# Altium PCB PCB.PcbDoc
Units mm, origin at the board's own origin, x right, y up, seen from the top; angles counter-clockwise.
Board outline 38 x 38 mm, 4 copper layers (L1 (SIG/PWR), L2 (GND), L3 (SIG/GND), L4 (SIG/PWR)), stack 0.603 mm thick; 79 components, 43 nets, 247 pads, 133 vias.
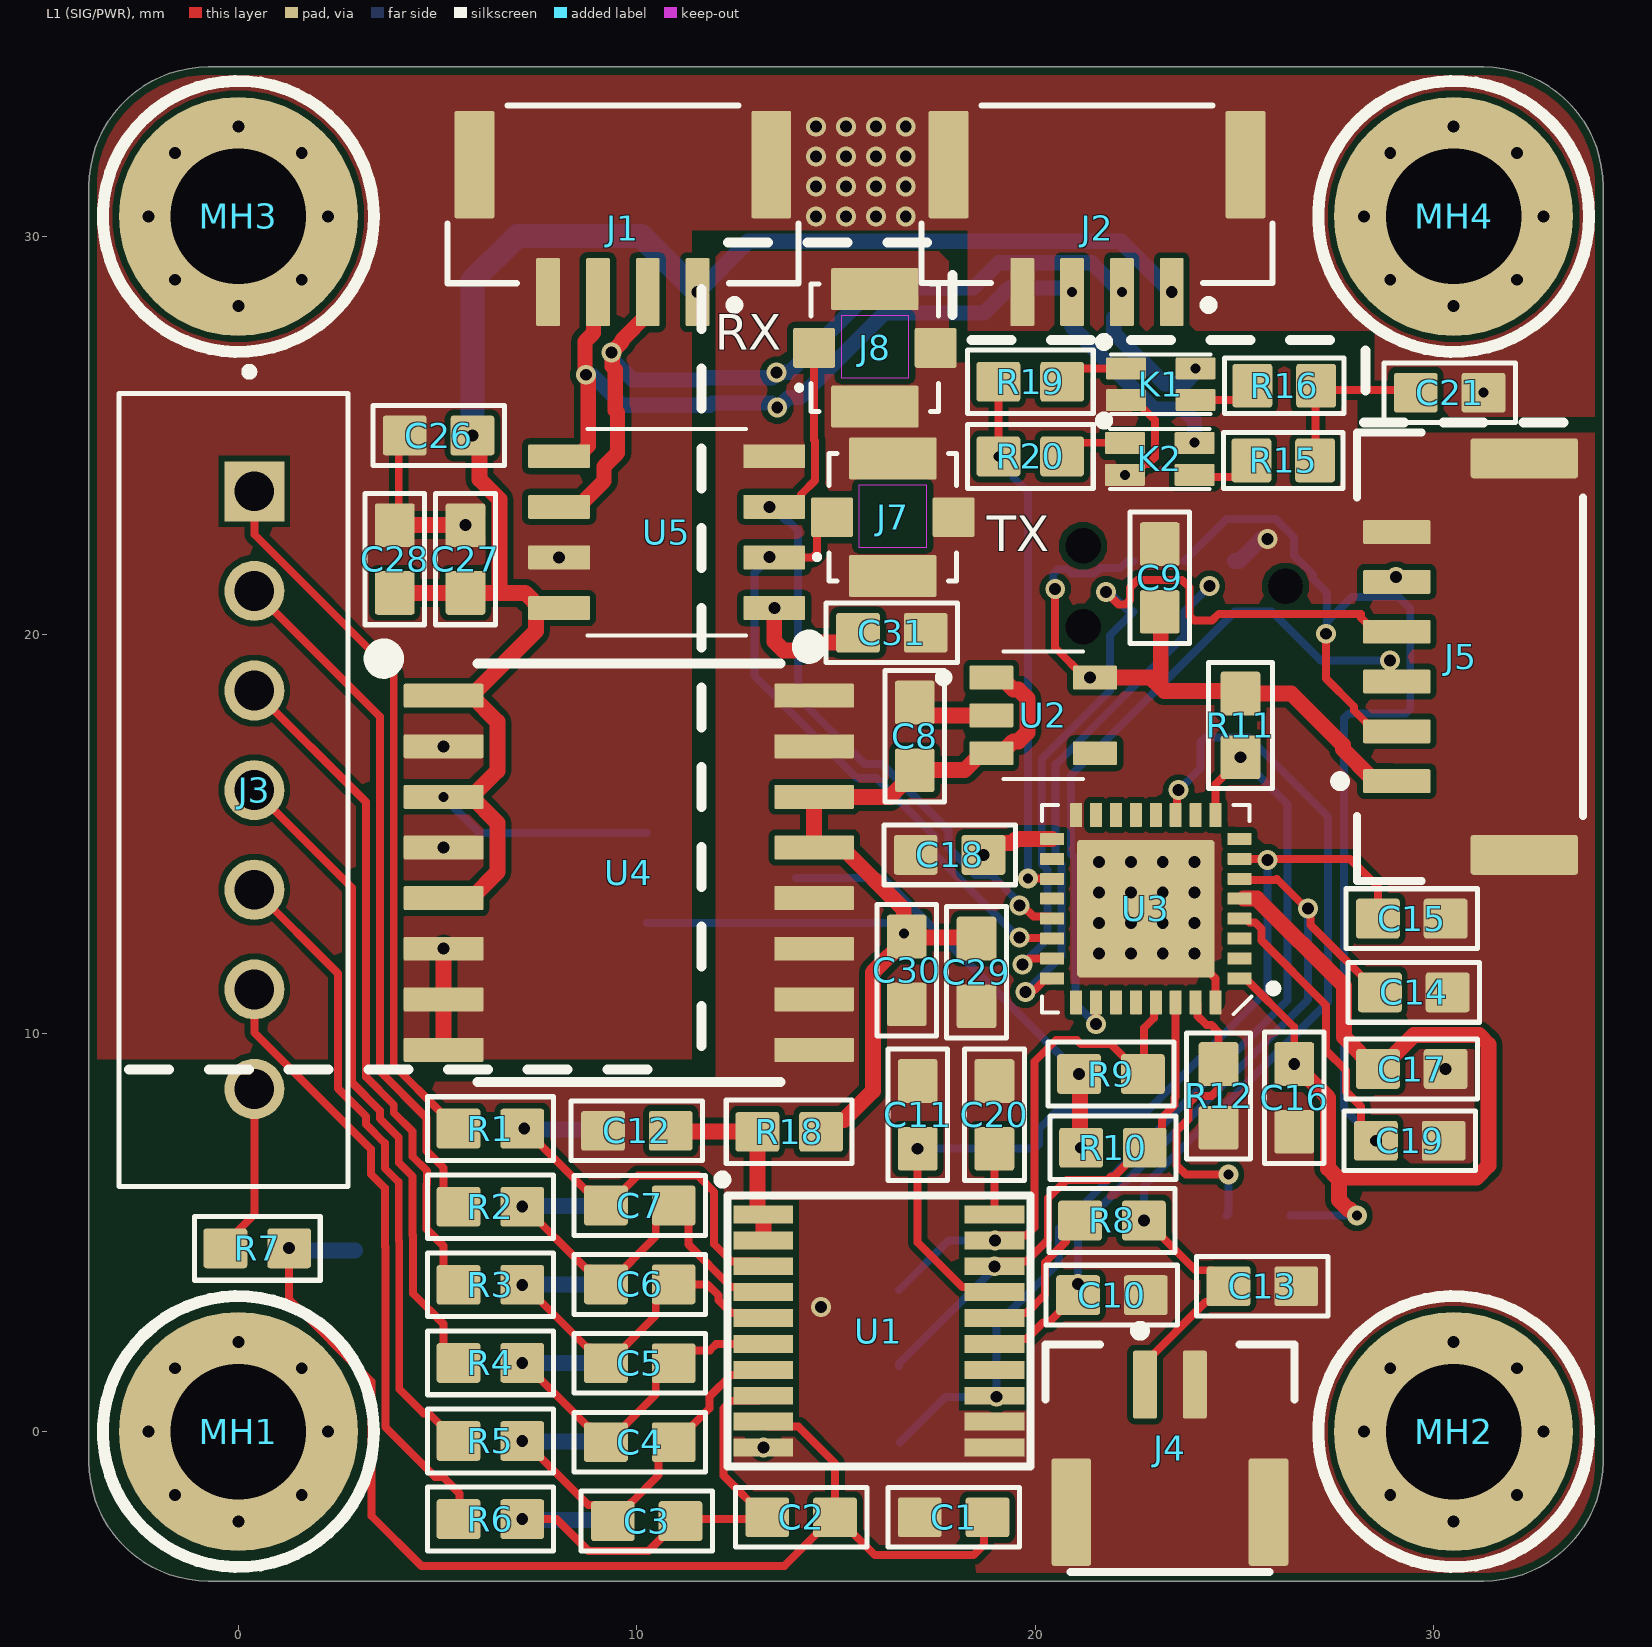
[diagram p0: L1 (SIG/PWR) view]
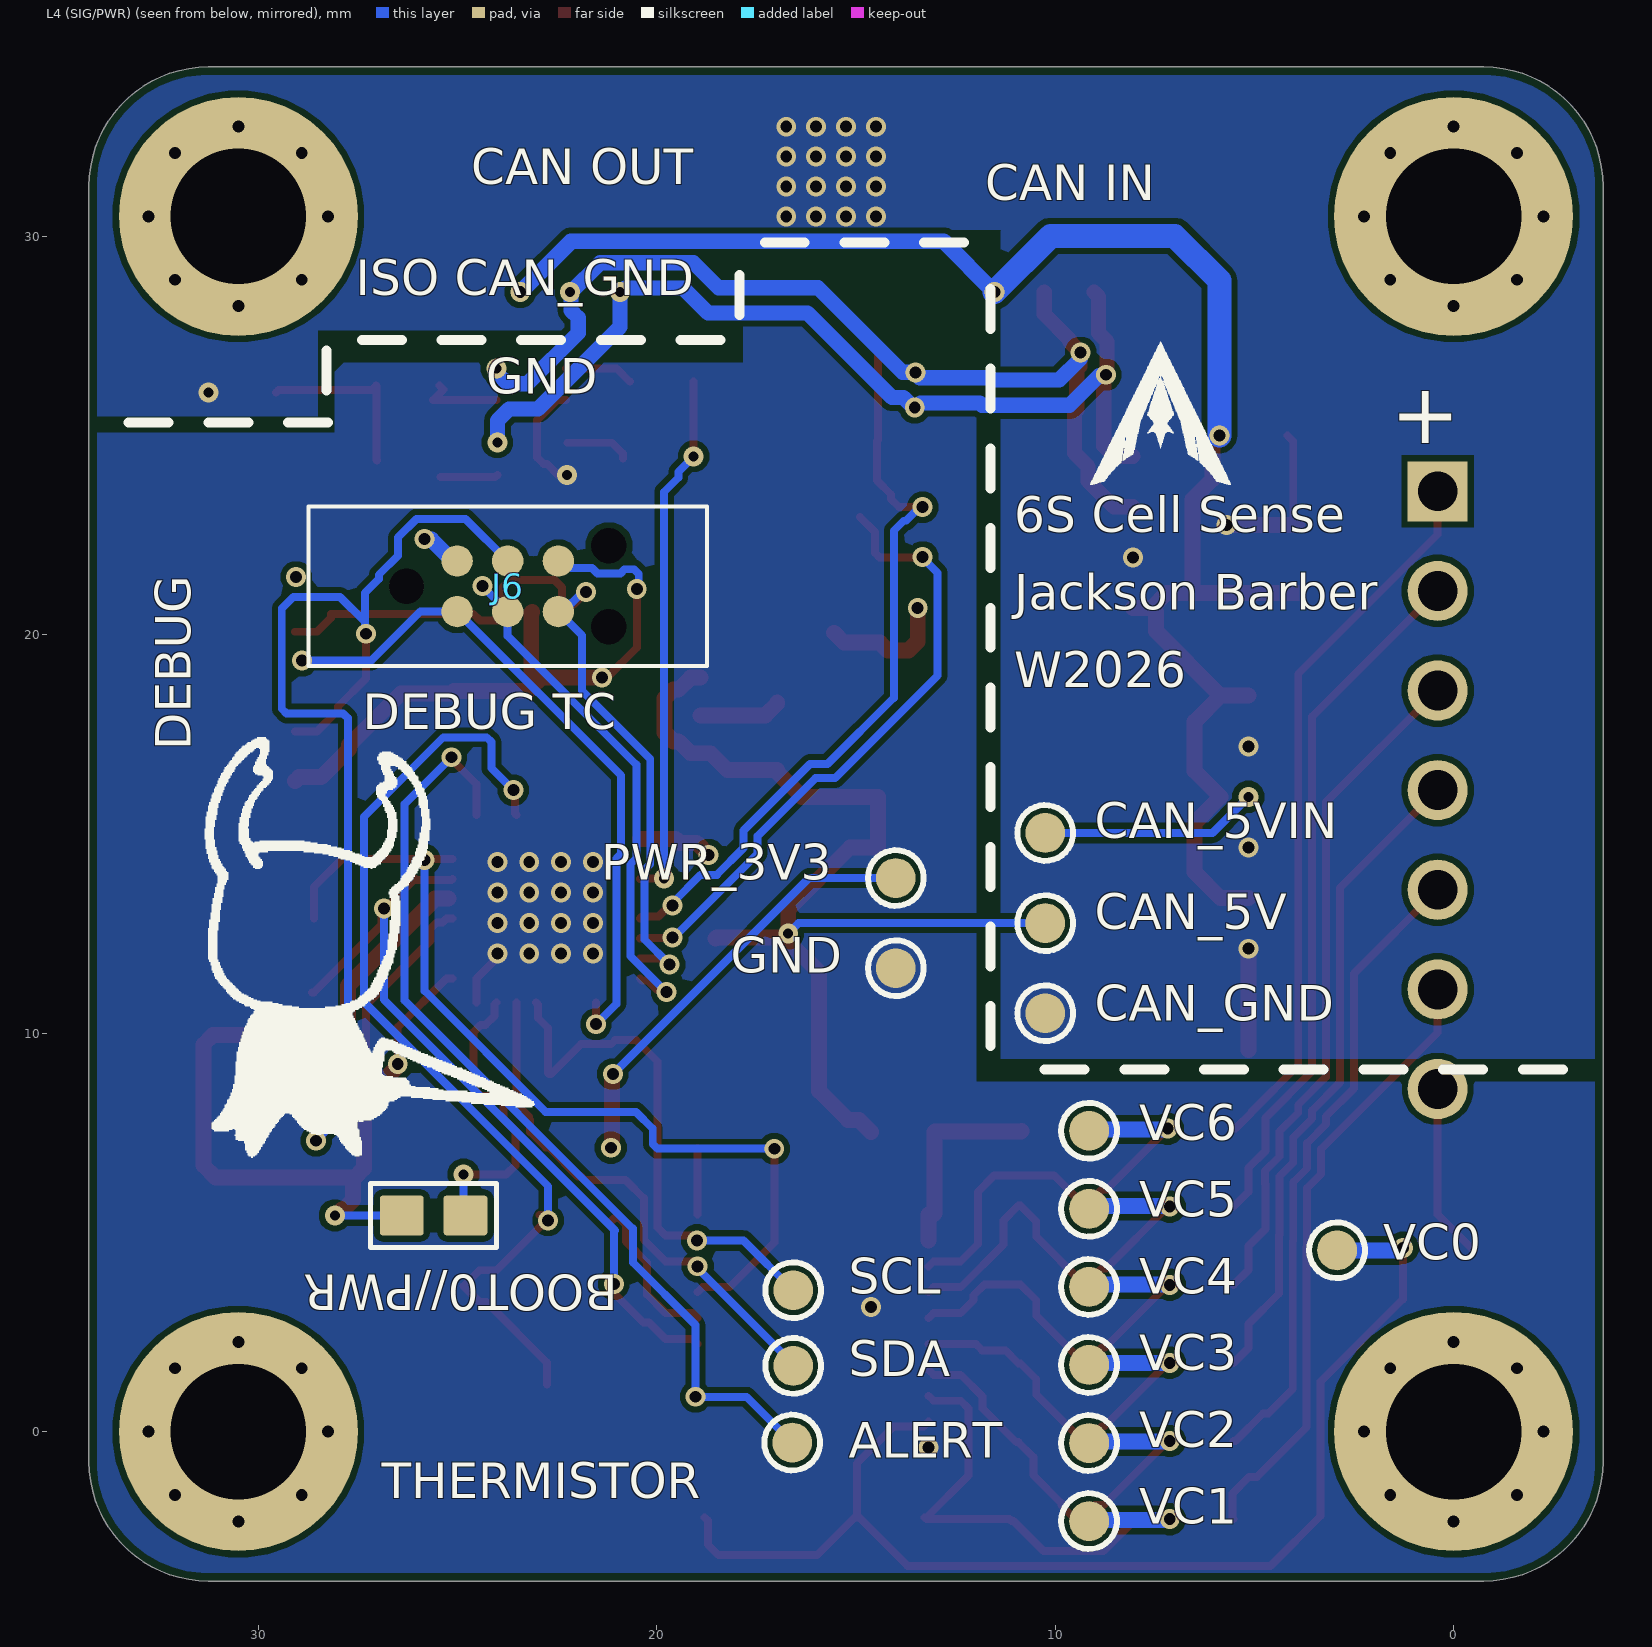
[diagram p1: L4 (SIG/PWR) view, seen from below]
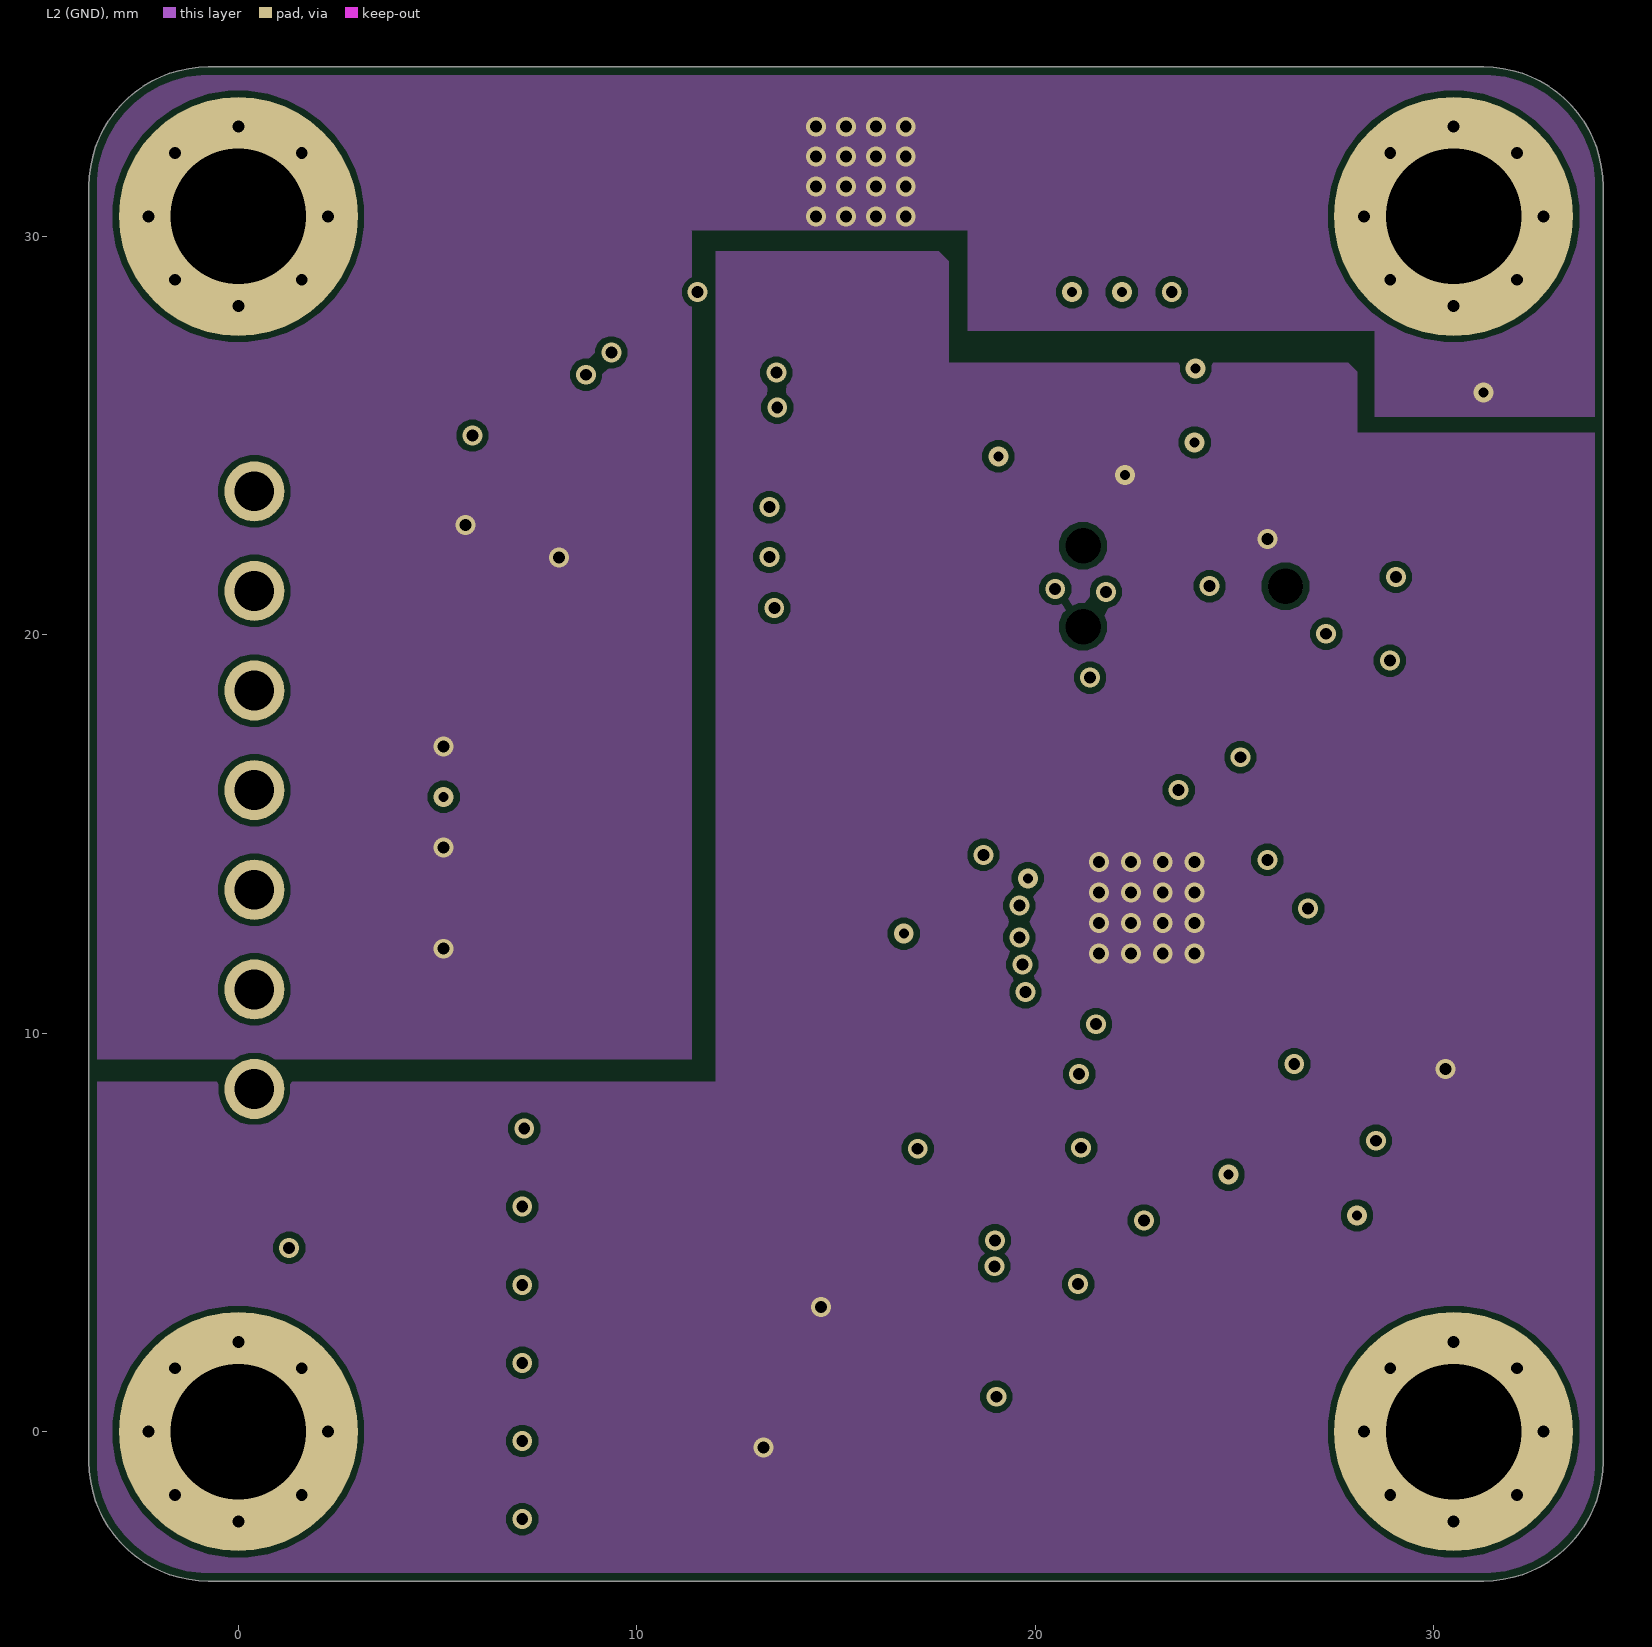
[diagram p2: L2 (GND)]
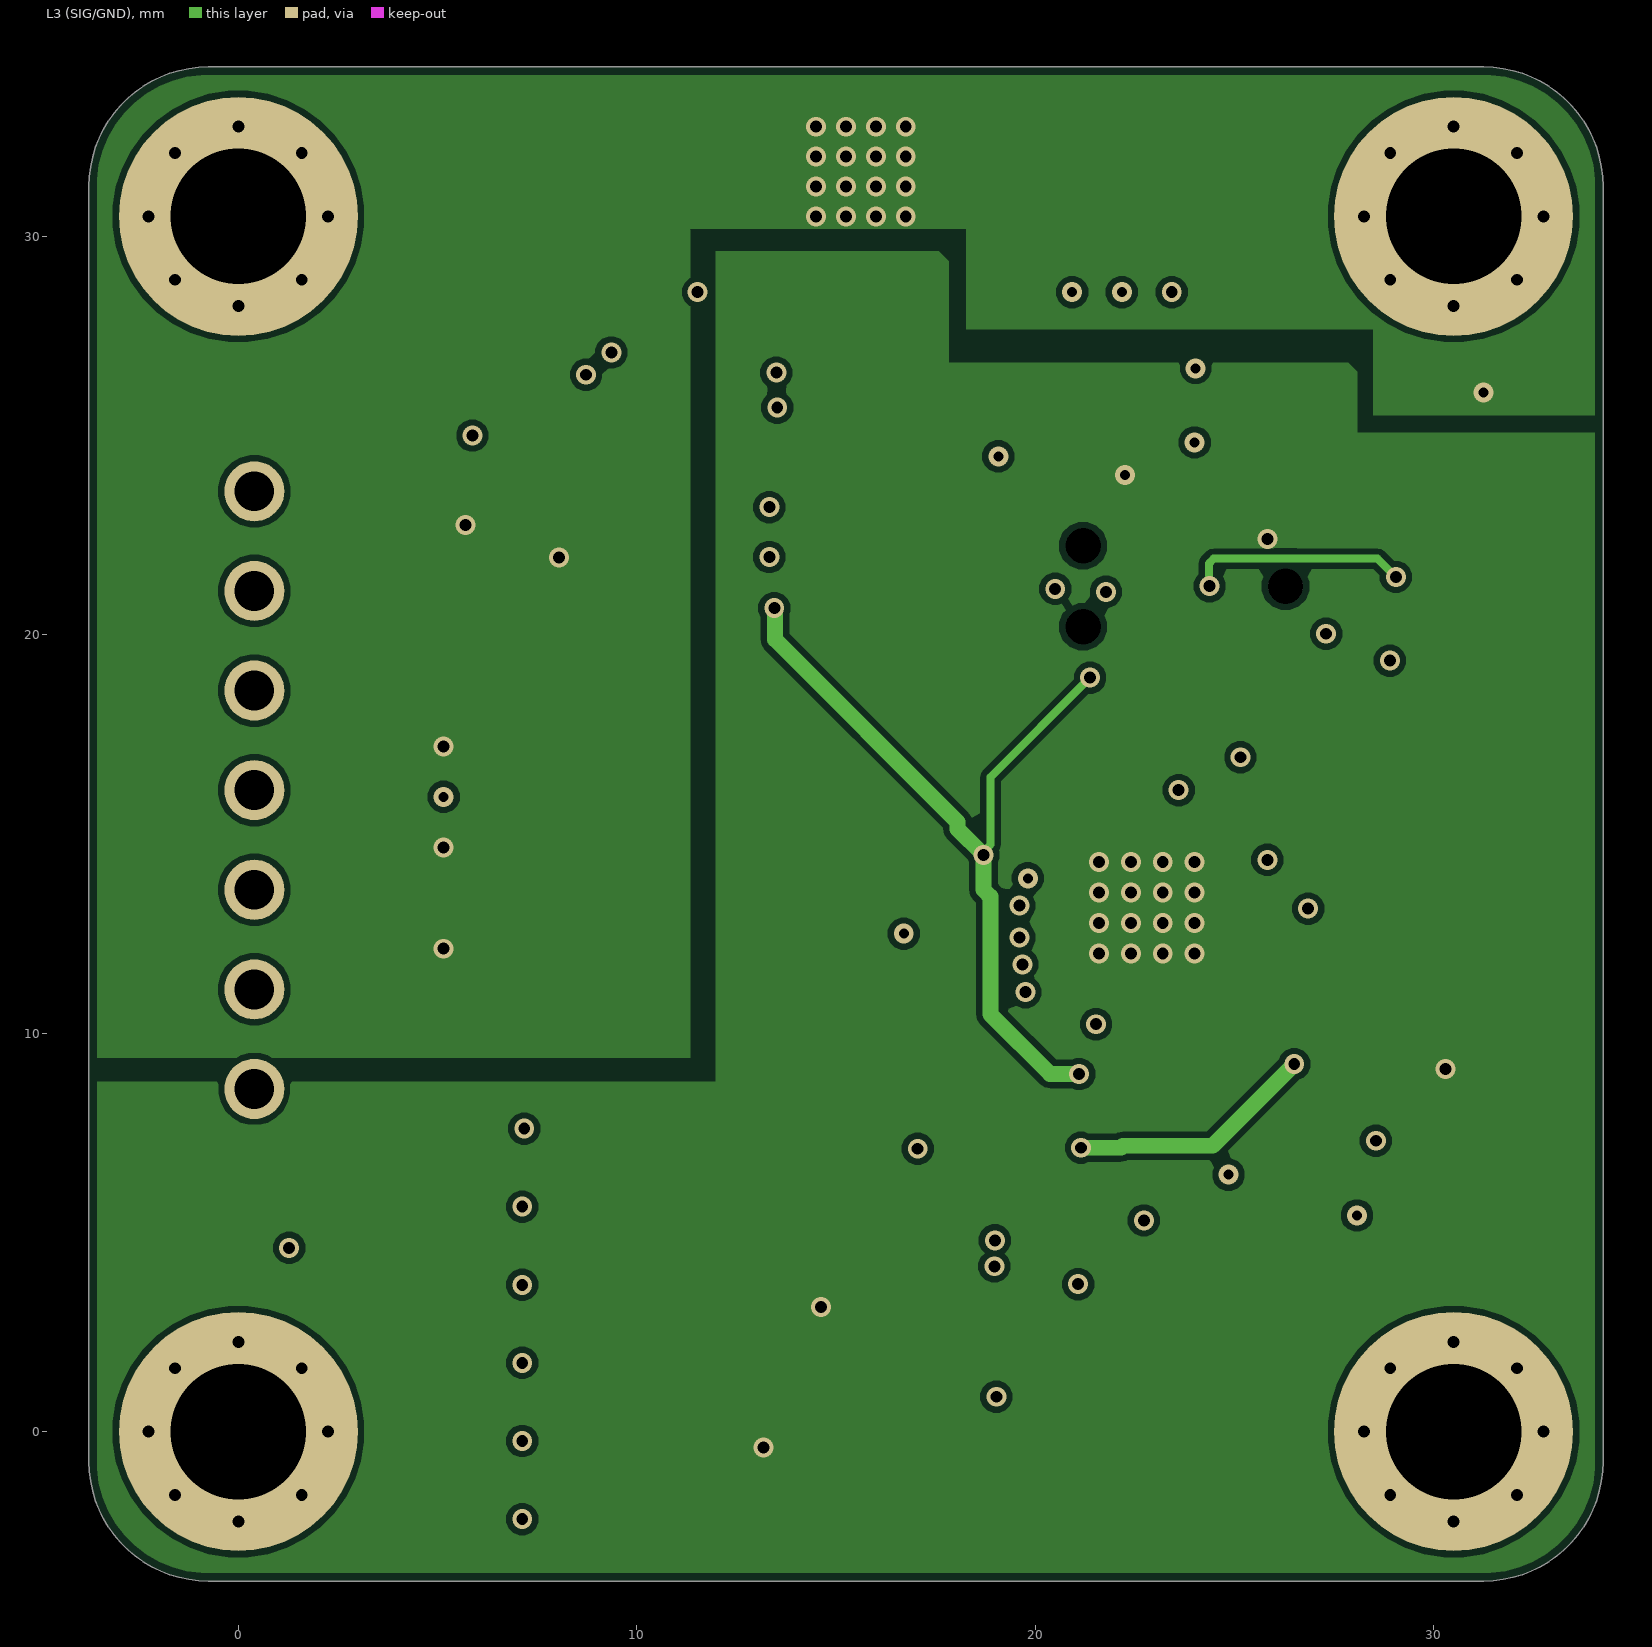
[diagram p3: L3 (SIG/GND)]
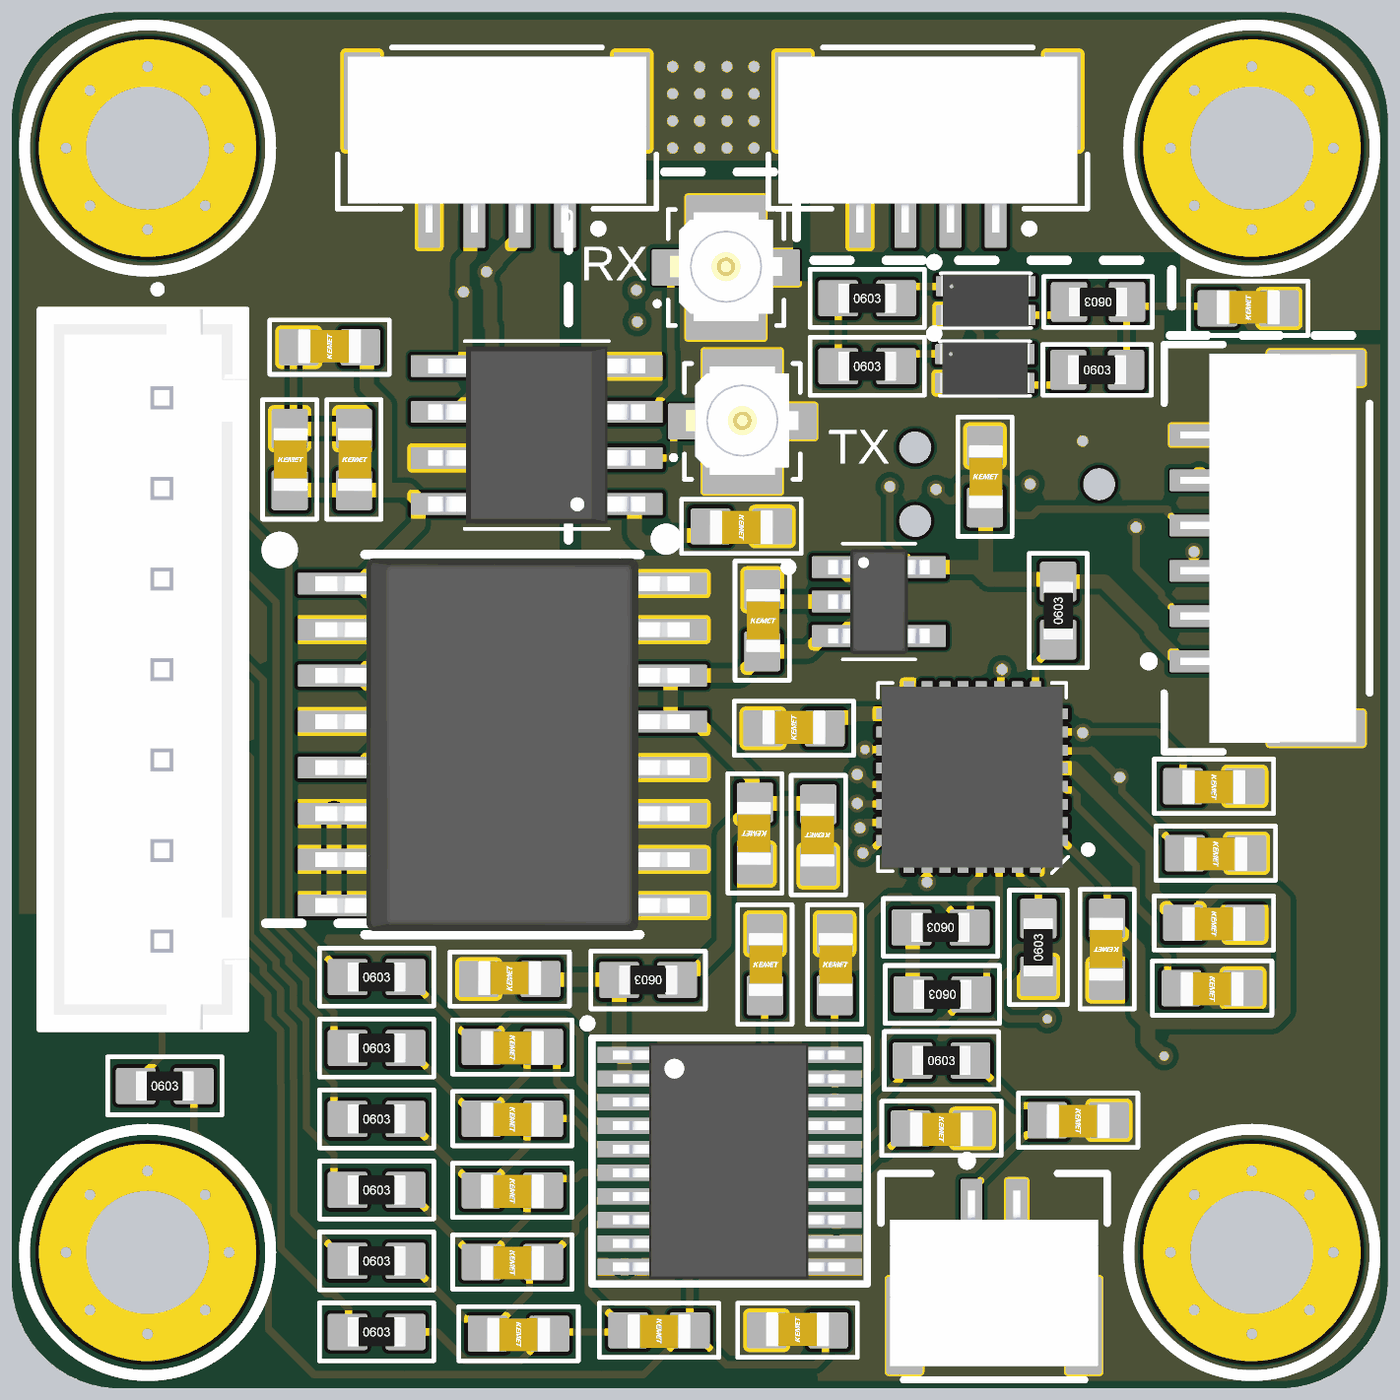
[diagram p4: 3D render of the assembled board from above, using the file's embedded part models]

## Layer stack, top to bottom
Top Solder: solder mask 0.0102, Solder Resist, Dk 3.5
L1 (SIG/PWR): signal copper 0.0356
Dielectric 2: prepreg 0.0711, PP-006, Dk 4.1
L2 (GND): signal copper 0.035
Dielectric 1: dielectric 0.32, FR-4, Dk 4.8
L3 (SIG/GND): signal copper 0.035
Dielectric 3: prepreg 0.0711, PP-006, Dk 4.1
L4 (SIG/PWR): signal copper 0.0356
Bottom Solder: solder mask 0.0102, Solder Resist, Dk 3.5

## Board outline
-3.75,-0.75 -3.75,31.25 cw(c-0.75,31.25) -0.75,34.25 31.25,34.25 cw(c31.25,31.25) 34.25,31.25 34.25,-0.75 cw(c31.25,-0.75) 31.25,-3.75 -0.75,-3.75 cw(c-0.75,-0.75)

## Design rules (kind name [scope] priority, off if disabled: settings)
BoardOutlineClearance [IsPolygon] p1: gap=0.2 ignorepadtopadclearanceinfootprint=FALSE
Clearance [All] p1: gap=0.15 ignorepadtopadclearanceinfootprint=FALSE
DiffPairsRouting [All] p1: maxlimit=0.254 minlimit=0.254 mostfreqgap=0.254 toplayer_minwidth=0.381 toplayer_maxwidth=0.381 toplayer_prefwidth=0.381 midlayer1_minwidth=0.381 midlayer1_maxwidth=0.381 midlayer1_prefwidth=0.381 midlayer2_minwidth=0.381 midlayer2_maxwidth=0.381 midlayer2_prefwidth=0.381 bottomlayer_minwidth=0.381 bottomlayer_maxwidth=0.381 bottomlayer_prefwidth=0.381 maxuncoupledlength=12.7
HoleSize [All] p1: absolutevalues=TRUE maxlimit=4 minlimit=0.025 maxpercent=80.000 minpercent=20.000
MinimumSolderMaskSliver [All] p1: minsoldermaskwidth=0.1
PolygonConnect [IsVia] p1: connectstyle=Direct reliefconductorwidth=0.254 reliefentries=4 polygonreliefangle="90 Angle" airgapwidth=0.254
PolygonConnect PolygonConnect_1 [All] p2: connectstyle=Direct reliefconductorwidth=0.254 reliefentries=4 polygonreliefangle="90 Angle" airgapwidth=0.254
RoutingVias [All] p1: holewidth=0.25 width=0.5 viastyle="Through Hole" minholewidth=0.25 minwidth=0.5 maxholewidth=0.3 maxwidth=0.5
ShortCircuit [InAnyNet vs InAnyNet] p1: allowed=FALSE
SolderMaskExpansion SolderMaskExpansion_2 [InComponent('U3')] p1: expansion=0.04 istentingtop=FALSE
SolderMaskExpansion SolderMaskExpansion_1 [IsVia] p2: expansion=0.102 istentingtop=TRUE
SolderMaskExpansion [All] p3: expansion=0.102 istentingtop=FALSE
SupplyNets "Schematic Supply Nets_4" [InNet('CAN_GND')] p1: voltage=0.000
SupplyNets "Schematic Supply Nets_3" [InNet('CAN_5VIN')] p2: voltage=0.000
SupplyNets "Schematic Supply Nets_2" [InNet('PWR_3V3')] p3: voltage=0.000
SupplyNets "Schematic Supply Nets_1" [InNet('GND')] p4: voltage=0.000
SupplyNets "Schematic Supply Nets" [InNet('CAN_5V')] p5: voltage=0.000
UnRoutedNet UnRoutedNet_1 [InAnyNet] p1:
Width [All] p1: maxlimit=0.6 minlimit=0.2 preferedwidth=0.4 minimp=50.000000 maximp=50.000000 favimp=50.000000
25 further rules are at their usual default settings.

## Classes and differential pairs
component class MCU: C1 C2 C3 C4 C5 C6 C7 C8 C9 C10 C11 C12 C13 C14 C15 C16 C17 C18 C19 C20 J3 J4 J5 J6 MH1 MH2 MH3 MH4 R1 R2 R3 R4 R5 R6 R7 R8 R9 R10 R11 R12 R18 TP1 TP2 TP3 TP4 TP5 TP6 TP7 TP8 TP9 TP10 TP11 TP12 TP13 TP14 TP15 U1 U2 U3
component class CAN: C21 C26 C27 C28 C29 C30 C31 J1 J2 J7 J8 K1 K2 R15 R16 R19 R20 U4 U5
differential pair CAN: +CAN_H -CAN_L

## Components (designator, comment, footprint, x,y, rotation, side; value= is the part's Value field where it differs from the comment)
ALERT "TESTINGPOINT_1MM" TESTINGPOINT_1MM-Footprint-1 16.6,-0.275 r90 bottom (schematic designator TP10)
BOOT0//PWR "RC0603JR-070RL" .RES_0603-Footprint-1 25.6,5.425 r0 bottom value=0
C1 "GRT188R61H105KE13D" .CAP_0603-Footprint-1 17.95,-2.15 r0 top
C2 "GRT188R61H105KE13D" .CAP_0603-Footprint-1 14.125,-2.15 r180 top
C3 "GRT188R61H105KE13D" .CAP_0603-Footprint-1 10.247,-2.245 r180 top
C4 "GRT188R61H105KE13D" .CAP_0603-Footprint-1 10.075,-0.265 r180 top
C5 "GRT188R61H105KE13D" .CAP_0603-Footprint-1 10.075,1.715 r180 top
C6 "GRT188R61H105KE13D" .CAP_0603-Footprint-1 10.075,3.695 r180 top
C7 "GRT188R61H105KE13D" .CAP_0603-Footprint-1 10.075,5.675 r180 top
C8 "GRT188R61H105KE13D" .CAP_0603-Footprint-1 16.975,17.45 r270 top
C9 "GRT188R61H105KE13D" .CAP_0603-Footprint-1 23.125,21.425 r270 top
C10 "GCM188R71H104KA57D" .CAP_0603-Footprint-1 21.925,3.425 r180 top value=0.1uF
C11 "GRT188R61H105KE13D" .CAP_0603-Footprint-1 17.05,7.95 r270 top
C12 "GRM188R6YA106MA73D" .CAP_0603-Footprint-1 10,7.55 r0 top
C13 "GCM188R71H104KA57D" .CAP_0603-Footprint-1 25.7,3.65 r180 top value=0.1uF
C14 "GCM188R71H104KA57D" .CAP_0603-Footprint-1 29.5,11.025 r180 top value=0.1uF
C15 "GCM188R71H104KA57D" .CAP_0603-Footprint-1 29.45,12.875 r180 top value=0.1uF
C16 "GRM188Z71C475KE21J" .CAP_0603-Footprint-1 26.5,8.375 r90 top value=4.7uF
C17 "GCM188R71H104KA57D" .CAP_0603-Footprint-1 29.45,9.1 r180 top value=0.1uF
C18 "GCM188R71H104KA57D" .CAP_0603-Footprint-1 17.85,14.475 r0 top value=0.1uF
C19 "GCM188R71H104KA57D" .CAP_0603-Footprint-1 29.4,7.3 r180 top value=0.1uF
C20 "GRM188Z71C475KE21J" .CAP_0603-Footprint-1 18.975,7.95 r270 top value=4.7uF
C21 "GCM188R71H472KA37D" .CAP_0603-Footprint-1 30.4,26.075 r0 top value=4.7nF
C26 "GCM188R71H104KA57D" .CAP_0603-Footprint-1 5.025,25 r0 top value=0.1uF
C27 "GRM188R6YA106MA73D" .CAP_0603-Footprint-1 5.7,21.9 r270 top
C28 "GCM188R71H104KA57D" .CAP_0603-Footprint-1 3.925,21.9 r270 top value=0.1uF
C29 "GRM188R6YA106MA73D" .CAP_0603-Footprint-1 18.525,11.525 r90 top
C30 "GCM188R71H104KA57D" .CAP_0603-Footprint-1 16.775,11.575 r90 top value=0.1uF
C31 "GCM188R71H104KA57D" .CAP_0603-Footprint-1 16.4,20.05 r180 top value=0.1uF
CAN_5V "TESTINGPOINT_1MM" TESTINGPOINT_1MM-Footprint-1 10.25,12.762 r90 bottom (schematic designator TP13)
CAN_5VIN "TESTINGPOINT_1MM" TESTINGPOINT_1MM-Footprint-1 10.25,15.025 r90 bottom (schematic designator TP15)
CAN_GND "TESTINGPOINT_1MM" TESTINGPOINT_1MM-Footprint-1 10.25,10.5 r90 bottom (schematic designator TP14)
GND "TESTINGPOINT_1MM" TESTINGPOINT_1MM-Footprint-1 14,11.631 r90 bottom (schematic designator TP12)
J1 "SM04B-GHS-TB(LF)(SN)" CONN_SM04B-GHS-TB_JST 9.65,30.475 r180 top
J2 "SM04B-GHS-TB(LF)(SN)" CONN_SM04B-GHS-TB_JST 21.55,30.476 r180 top
J3 "B7B-XH-A" JST_B7B-XH-A -0.125,16.1 r90 top
J4 "SM02B-GHS-TB" SM02B-GHS-TB-Footprint-1 23.379,-1.094 r0 top
J5 "SM06B-GHS-TB" SM06B-GHS-TB 31.35,19.45 r90 top
J6 "TC2030-FP-NL" TC2030-FP-NL 26.28,21.216 r180 bottom
J7 "CONMHF1-SMD-T" CONMHF1-SMD-T-Footprint-1 16.425,22.95 r90 top
J8 "CONMHF1-SMD-T" CONMHF1-SMD-T-Footprint-1 15.975,27.2 r90 top
K1 "TLP3451(TP,F" TLP3451(TP,F-Footprint-1 23.15,26.286 r0 top
K2 "TLP3451(TP,F" TLP3451(TP,F-Footprint-1 23.125,24.411 r0 top
MH1 "M3HOLE-STANDARD" M3HOLE-STANDARD-Footprint-1#1 0,0 r0 top
MH2 "M3HOLE-STANDARD" M3HOLE-STANDARD-Footprint-1#2 30.5,0 r0 top
MH3 "M3HOLE-STANDARD" M3HOLE-STANDARD-Footprint-1#3 0,30.5 r0 top
MH4 "M3HOLE-STANDARD" M3HOLE-STANDARD-Footprint-1#4 30.5,30.5 r0 top
PWR_3V3 "TESTINGPOINT_1MM" TESTINGPOINT_1MM-Footprint-1 14,13.894 r90 bottom (schematic designator TP11)
R1 "RC0603FR-07100RL" .RES_0603-Footprint-1 6.325,7.605 r0 top
R2 "RC0603FR-07100RL" .RES_0603-Footprint-1 6.325,5.645 r0 top
R3 "RC0603FR-07100RL" .RES_0603-Footprint-1 6.325,3.685 r0 top
R4 "RC0603FR-07100RL" .RES_0603-Footprint-1 6.325,1.725 r0 top
R5 "RC0603FR-07100RL" .RES_0603-Footprint-1 6.325,-0.235 r0 top
R6 "RC0603FR-07100RL" .RES_0603-Footprint-1 6.325,-2.195 r0 top
R7 "RC0603FR-07100RL" .RES_0603-Footprint-1 0.475,4.6 r0 top
R8 "RC0603FR-0710KL" .RES_0603-Footprint-1 21.925,5.3 r0 top value=10k
R9 "RC0603FR-074K7L" .RES_0603-Footprint-1 21.9,8.975 r180 top
R10 "RC0603FR-074K7L" .RES_0603-Footprint-1 21.95,7.125 r180 top
R11 "RC0603FR-074K7L" .RES_0603-Footprint-1 25.15,17.725 r90 top
R12 "RC0603FR-0710KL" .RES_0603-Footprint-1 24.6,8.425 r90 top value=10k
R15 "RC0603FR-1360R4L" RES0603 26.225,24.375 r0 top value=60.4R
R16 "RC0603FR-1360R4L" RES0603 26.25,26.25 r180 top value=60.4R
R18 "RC0603FR-07100RL" .RES_0603-Footprint-1 13.825,7.525 r180 top
R19 "RC0603FR-071KL" .RES_0603-Footprint-1 19.875,26.35 r0 top value=1k
R20 "RC0603FR-071KL" .RES_0603-Footprint-1 19.875,24.475 r0 top value=1k
SCL "TESTINGPOINT_1MM" TESTINGPOINT_1MM-Footprint-1 16.575,3.55 r90 bottom (schematic designator TP8)
SDA "TESTINGPOINT_1MM" TESTINGPOINT_1MM-Footprint-1 16.575,1.65 r90 bottom (schematic designator TP9)
U1 "BQ76925PWR" BQ76925PWR-Footprint-1 16.075,2.525 r0 top
U2 "TLV75533PDBVR" SOT-23-5 20.2,17.975 r0 top
U3 "STM32L431KCU6" STM32L431KCU6-Footprint-1 22.775,13.125 r180 top
U4 "UCC12050DVE" 16SOIC-Footprint 9.8,14.025 r0 top
U5 "ISO1044BD" 8SOIC-Footprint-1 10.75,22.575 r180 top
VC0 "TESTINGPOINT_1MM" TESTINGPOINT_1MM-Footprint-1 2.925,4.55 r180 bottom (schematic designator TP1)
VC1 "TESTINGPOINT_1MM" TESTINGPOINT_1MM-Footprint-1 9.15,-2.245 r90 bottom (schematic designator TP2)
VC2 "TESTINGPOINT_1MM" TESTINGPOINT_1MM-Footprint-1 9.15,-0.286 r90 bottom (schematic designator TP3)
VC3 "TESTINGPOINT_1MM" TESTINGPOINT_1MM-Footprint-1 9.15,1.673 r90 bottom (schematic designator TP4)
VC4 "TESTINGPOINT_1MM" TESTINGPOINT_1MM-Footprint-1 9.15,3.632 r90 bottom (schematic designator TP5)
VC5 "TESTINGPOINT_1MM" TESTINGPOINT_1MM-Footprint-1 9.15,5.591 r90 bottom (schematic designator TP6)
VC6 "TESTINGPOINT_1MM" TESTINGPOINT_1MM-Footprint-1 9.15,7.55 r90 bottom (schematic designator TP7)

## Footprints (in the part's own frame and the unit in brackets; to place one, negate y for a bottom-side part, rotate by r counter-clockwise, add the part's x,y. Pads: shape width x height; smd on the part's side, far side on the other; paste and mask are expansions set on the pad)
8SOIC-Footprint-1 [mm]
  rrect10% 1.55x0.6 smd: 1(-2.7,1.905) 2(-2.7,0.635) 3(-2.7,-0.635) 4(-2.7,-1.905) 5(2.7,-1.905) 6(2.7,-0.635) 7(2.7,0.635) 8(2.7,1.905)
  silkscreen extent -3.75,-2.59 1.99,3.05, body extent -3,-2.45 3,2.45, height 1.75
16SOIC-Footprint [mm]
  rrect10% 2x0.6 smd: 1(-4.65,4.445) 2(-4.65,3.175) 3(-4.65,1.905) 4(-4.65,0.635) 5(-4.65,-0.635) 6(-4.65,-1.905) 7(-4.65,-3.175) 8(-4.65,-4.445) 9(4.65,-4.445) 10(4.65,-3.175) 11(4.65,-1.905) 12(4.65,-0.635) 13(4.65,0.635) 14(4.65,1.905) 15(4.65,3.175) 16(4.65,4.445)
  silkscreen extent -6.4,-5.25 3.8,5.62, body extent -5.17,-5.15 5.17,5.15, height 2.59
.CAP_0603-Footprint-1 [mm]
  rrect15% 1.1x1 smd: 1(-0.85,0) 2(0.85,0)
  silkscreen extent -1.65,-0.75 1.65,0.75, body extent -0.87,-0.45 0.87,0.5, height 0.87
.RES_0603-Footprint-1 [mm]
  rrect15% 1.1x1 smd: 1(-0.8,0) 2(0.8,0)
  silkscreen extent -1.58,-0.8 1.58,0.8, body extent -0.8,-0.4 0.8,0.4, height 0.46
BQ76925PWR-Footprint-1 [mm]
  rect 1.5x0.45 smd mask-2539.97: 1(-2.9,2.925) 2(-2.9,2.275) 3(-2.9,1.625) 4(-2.9,0.975) 5(-2.9,0.325) 6(-2.9,-0.325) 7(-2.9,-0.975) 8(-2.9,-1.625) 9(-2.9,-2.275) 10(-2.9,-2.925) 11(2.9,-2.925) 12(2.9,-2.275) 13(2.9,-1.625) 14(2.9,-0.975) 15(2.9,-0.325) 16(2.9,0.325) 17(2.9,0.975) 18(2.9,1.625) 19(2.9,2.275) 20(2.9,2.925)
  silkscreen extent -4.03,-3.4 3.8,3.9, body extent -3.23,-3.25 3.17,3.25, height 1.2
CONMHF1-SMD-T-Footprint-1 [mm]
  rrect10% 1x1.05 smd mask+0.05: 1(0,1.525) 4(0,-1.525)
  rrect9% 1.05x2.2 smd mask+0.05: 2(-1.475,0) 3(1.475,0)
  silkscreen extent -1.6,-1.6 1.6,1.95, body extent -1.48,-1.55 1.52,1.55, height 1.31
CONN_SM04B-GHS-TB_JST [mm]
  rrect10% 0.6x1.7 smd: 1(-1.875,1.876) 2(-0.625,1.876) 3(0.625,1.876) 4(1.875,1.876)
  rrect10% 1x2.7 smd: 5(-3.725,-1.324) 6(3.725,-1.324)
  silkscreen extent -4.4,-2.8 4.4,2.3, body extent -4.13,-2.55 4.13,2.3, height 4.25
JST_B7B-XH-A [mm]
  rect 1.508x1.508 / inner round 1.508 / far side rect 1.508x1.508 hole 1: 1(7.5,-0.525)
  round 1.508 hole 1: 2(5,-0.525) 3(2.5,-0.525) 4(0,-0.525) 5(-2.5,-0.525) 6(-5,-0.525) 7(-7.5,-0.525)
  silkscreen extent -9.95,-2.88 10.6,2.88, body extent -9.95,-2.88 9.95,2.88, height 7
M3HOLE-STANDARD-Footprint-1#1 [mm]
  round 6 hole 3.4: 3(0,0)
  silkscreen extent -3.4,-3.4 3.4,3.4
M3HOLE-STANDARD-Footprint-1#2 [mm]
  round 6 hole 3.4: 2(0,0)
  silkscreen extent -3.4,-3.4 3.4,3.4
M3HOLE-STANDARD-Footprint-1#3 [mm]
  round 6 hole 3.4: 4(0,0)
  silkscreen extent -3.4,-3.4 3.4,3.4
M3HOLE-STANDARD-Footprint-1#4 [mm]
  round 6 hole 3.4: 1(0,0)
  silkscreen extent -3.4,-3.4 3.4,3.4
RES0603 [mm] "SMT Resistor 0603"
  rrect15% 1x1.1 smd: 1(-0.8,0) 2(0.8,0)
  silkscreen extent -1.5,-0.7 1.5,0.7, body extent -0.8,-0.4 0.8,0.4, height 0.46
SM02B-GHS-TB-Footprint-1 [mm]
  rrect15% 0.6x1.7 smd paste+0 mask+0.05: 1(-0.625,2.275) 2(0.625,2.275)
  rrect15% 1x2.7 smd paste+0 mask+0.05: 3(-2.475,-0.925) 4(2.475,-0.925)
  silkscreen extent -3.13,-2.42 3.13,3.75, body extent -2.88,-2.05 2.88,2.8, height 4.08
SM06B-GHS-TB [mm]
  rrect15% 0.6x1.7 smd paste+0 mask+0.05: 1(-3.125,2.275) 2(-1.875,2.275) 3(-0.625,2.275) 4(0.625,2.275) 5(1.875,2.275) 6(3.125,2.275)
  rrect15% 1x2.7 smd paste+0 mask+0.05: 7(-4.975,-0.925) 8(4.975,-0.925)
  silkscreen extent -5.62,-2.4 5.63,3.82, body extent -5.58,-2.37 5.58,3.22, height 0.25
SOT-23-5 [mm]
  rrect10% 1.1x0.6 smd: 1(-1.3,0.95) 2(-1.3,0) 3(-1.3,-0.95) 4(1.3,-0.95) 5(1.3,0.95)
  silkscreen extent -2.61,-1.6 1,1.6, body extent -1.4,-1.45 1.4,1.45, height 1.45
STM32L431KCU6-Footprint-1 [mm]
  rrect10% 0.6x0.3 smd: 1(-2.35,1.75) 2(-2.35,1.25) 3(-2.35,0.75) 4(-2.35,0.25) 5(-2.35,-0.25) 6(-2.35,-0.75) 7(-2.35,-1.25) 8(-2.35,-1.75) 17(2.35,-1.75) 18(2.35,-1.25) 19(2.35,-0.75) 20(2.35,-0.25) 21(2.35,0.25) 22(2.35,0.75) 23(2.35,1.25) 24(2.35,1.75)
  rrect10% 0.3x0.6 smd: 9(-1.75,-2.35) 10(-1.25,-2.35) 11(-0.75,-2.35) 12(-0.25,-2.35) 13(0.25,-2.35) 14(0.75,-2.35) 15(1.25,-2.35) 16(1.75,-2.35) 25(1.75,2.35) 26(1.25,2.35) 27(0.75,2.35) 28(0.25,2.35) 29(-0.25,2.35) 30(-0.75,2.35) 31(-1.25,2.35) 32(-1.75,2.35)
  rrect5% 3.45x3.45 smd paste-2539.97: 33(0,0)
  silkscreen extent -3.3,-2.6 2.6,2.65, body extent -2.5,-2.5 2.5,2.5, height 0.61
TC2030-FP-NL [mil] "For TC2030-CTX-NL-STDC14 for use with STM32 processors with STLINK-V3 /STLINK-V3MINI"
  round 31 smd: 1(50,-25) 2(50,25) 3(100,-25) 4(100,25) 5(150,-25) 6(150,25)
  round 34 hole 35 unplated: A(0,0) B(200,40) C(200,-40)
  silkscreen extent -97,-79 297,79
TESTINGPOINT_1MM-Footprint-1 [mm]
  round 1 smd: 1(0,0)
  silkscreen extent -0.7,-0.7 0.7,0.7
TLP3451(TP,F-Footprint-1 [mm]
  rrect10% 1x0.55 smd: 1(-0.875,0.4) 2(-0.875,-0.4) 3(0.875,-0.4) 4(0.875,0.4)
  silkscreen extent -1.52,-0.75 1.25,1.16, body extent -1.23,-0.72 1.23,0.72, height 1.4

## Part data
ALERT CAN_5V CAN_5VIN CAN_GND GND PWR_3V3 SCL SDA VC0 VC1 VC2 VC3 VC4 VC5 VC6: library part CMP-00028-00002-2, "Testing Point 1mm Radius", Radius=1mm
BOOT0//PWR: library part CMP-009-00017-4, "RES 0 OHM 1% 1/10W 0603", Package=0603, Power=1/10W, Resistance=0Ω, Tolerance=1%
C1 C2 C3 C4 C5 C6 C7 C8 C9 C11: library part CMP-00096-4, "CAP CER 1UF 50V X5R 0603", Capacitance=1uF, Dielectric=X5R, Package=0603, Voltage=50V
C10 C13 C14 C15 C17 C18 C19 C26 C28 C30 C31: library part CMP-00047-4, "CAP CER 0.1uF 50V X7R 0603", Capacitance=100nF, Case Code (Imperial)=0603, Dielectric=X7R, Tolerance=10%, Voltage=50V, Mount="Surface Mount"
C12 C27 C29: library part CMP-00449-4, "CAP CER 10UF 35V X5R 0603", Capacitance=10uF, Temperature Coefficient=X5R, Tolerance=±20%, Voltage=35V
C16 C20: library part CMP-00441-2, "CAP CER 4.7UF 16V X7R 0603", Capacitor Type=Ceramic, Case/Package=0603, Digikey Part Number 1=490-GRM188Z71C475KE21JCT-ND, Manufacturer 1="Murata Electronics", Temperature Coefficient=X7R, Voltage Rating=16V, Manufacturer Part Number 1=GRM188Z71C475KE21J, Mounting Technology="Surface Mount"
C21: library part CMP-001-00080-1, "CAP CER 4700PF 50V X7R 0603", Capacitor Type=Ceramic, Case/Package=0603, Max Operating Temperature=125°C, Min Operating Temperature=-55°C, Package Shape=Rectangular, Package Style=SMTMeter, Rated DC Voltage (URdc)=50V, Temperature Characteristics Code=X7R, Tolerance  (fill in as +-)=10%, Dielectric Material=Ceramic, Height=0.9mm, JESD-609 Code=e3, Length=1.6mm, Mounting Technology="Surface Mount", Multilayer=Yes, Packaging="Tape and Reel", Pins=2, Reach SVHC Compliant=Yes, Reference Standard=AEC-Q200, RoHS Compliant=Yes, Terminal Finish=Nickel, Termination=Wraparound, Tolerance (fill in as +-)=10%, Width=0.8mm
J1 J2: library part CMP-068-000000-6, "Conn Shrouded Header HDR 4 POS 1.25mm Solder RA SMD Reel", Entry Type=R/A, Pins=4, Series=JST-GH
J3: library part CMP-113-000000-4, "Connector Header Through Hole 7 position 0.098 (2.50mm)", Package=None, Check_prices=https://www.snapeda.com/parts/B7B-XH-A/JST+Sales+America+Inc./view-part/?ref=eda, Component Type=Standard, Design Item ID=B7B-XH-A, MF="JST Sales", MP=B7B-XH-A, Pin Count=7, SnapEDA_Link=https://www.snapeda.com/parts/B7B-XH-A/JST+Sales+America+Inc./view-part/?ref=snap, Source=B7B-XH-A.SchLib
J4: library part CMP-129-000035-2, "CONN HEADER SMD R/A 2POS 1.25MM", Contact Gender=Male, Terminal Pitch=1.25mm
J5: library part CMP-00248-4, "CONN HEADER SMD R/A 6POS 1.25MM", Current Rating=1A, Voltage=50V, Entry Type=R/A, Pitch=1.25mm, Positions=6, Rows=1, Series=JST-GH
J6: library part CMP-129-000024-1, "For TC2030-CTX-NL-STDC14 for use with STM32 processors with STLINK-V3 /STLINK-V3MINI", Manufacturer=Tag-Connect, Pin Count=10
J7 J8: library part CMP-00321-7, "CONN UMC JACK STR SMD", Max Frequency=6GHz, Voltage Rating=60V, Impedance=50Ω, Mounting Type="Surface Mount"
K1 K2: library part CMP-00646-3, "Solid State Relay 20MA 1.4V Dc-in Ac/dc-out 4-PIN Vson T/r"
MH1 MH2 MH3 MH4: library part CMP-00005-4, "Standard M3 Mounting hole as defined by mech team, see confluence for reasonning", Hole Diam=3.4, Plating Diam=6
R1 R2 R3 R4 R5 R6 R7 R18: library part CMP-00022-4, "RES 100 OHM 1% 1/10W 0603", Package=0603, Power=1/10W, Resistance=100Ω, Tolerance=±1%
R8 R12: library part CMP-009-00006-5, "RES 10K OHM 1% 1/10W 0603", Package=0603, Power=1/10W, Resistance=10k, Tolerance=1%
R9 R10 R11: library part CMP-00344-1, "RES 4.7K OHM 1% 1/10W 0603", Package=0603, Power=1/10W, Resistance=4.7k, Tolerance=1%
R15 R16: library part CMP-00245-1, "RES 60.4 OHM 1% 1/10W 0603", Power=100mW, Tolerance=1%
R19 R20: library part CMP-009-00012-4, "RES 1k OHM 1% 1/10W 0603", Package=0603, Power=1/10W, Tolerance=1%
U1: library part CMP-00260-2, "Power Supply Support Circuit, Adjustable, 1 Channel, PDSO20", Case/Package=TSSOP, Max Operating Temperature=85°C, Max Supply Voltage=26.4V, Min Operating Temperature=-25°C, Min Supply Voltage=4.2V, Nominal Supply Voltage=21.6V, Package Body Material=Plastic, Package Equivalence Code=TSSOP20,.25, Package Shape=Rectangular, Package Style="SMALL OUTLINE, THIN PROFILE, SHRINK PITCHMeter", Peak Reflow Temperature (Cel)=260°C, Power Supplies=4.2/26.4V, Supply Current-Max (Isup)=48uA, Temperature Grade=OTHER, Adjustable Threshold=Yes, Channels=1, Height - Seated (Max)=1.2mm, JESD-30 Code=R-PDSO-G20, JESD-609 Code=e4, Length=6.5mm, Moisture Sensitivity Level=2, Number of Channels=1, Pins=20, Qualification Status="Not Qualified", Reach SVHC Compliant=Yes, RoHS Compliant=Yes, Surface Mount=Yes, Terminal Finish=Nickel, Terminal Form="Gull Wing", Terminal Pitch=0.65mm, Terminal Position=DUAL, Throw Configuration="POWER SUPPLY SUPPORT CIRCUIT", Width=4.4mm
U2: library part CMP-00225-6, "IC REG LINEAR 3.3V 500MA SOT23-5", Current=500mA, Output Voltage="3.3 V"
U3: library part CMP-00224-6, "IC MCU 32BIT 256KB FLSH 32UFQFPN"
U4: library part CMP-147-000011-2, "DC DC CONVERTER 3.3V 5V 500MW", ComponentLink1Description=Datasheet, ComponentLink2Description="Manufacturer URL", ComponentLink3Description="Package Specification"
U5: library part CMP-147-000015-1, "Isolated CAN FD transceiver in small package 8-SOIC -40 to 125", Case/Package=SOIC, Max Operating Temperature=125°C, Max Supply Voltage=5.5V, Min Supply Voltage=1.71V, ComponentLink1Description=Datasheet, ComponentLink2Description="Manufacturer URL", ComponentLink3Description="Package Specification"

## Via types
v1: diameter 0.5, hole 0.3, L1 (SIG/PWR) to L4 (SIG/PWR), tented both sides, 121 vias
v2: diameter 0.5, hole 0.25, L1 (SIG/PWR) to L4 (SIG/PWR), tented both sides, 12 vias

## Nets (pads, with @x,y where several pads share a name; then routed paths per layer and width w, separated by ;. In a path a pad name is that pad's centre, name@x,y a point inside that pad or via, vN(x,y) a via of type N, cw(c..) or ccw(c..) an arc to the next point about the centre after c; other vN are vias at no path point)
5VIN_AFE: C12.2 R18.2 U1.1 U1.2 | length 5
  L1 (SIG/PWR) w0.4: C12.2 10.863,7.538 13.012,7.538 R18.2 13.025,5.475 13.05,5.45 U1.1 U1.2
ALERT: ALERT.1 R11.1 U1.13 U3.9 | length 24.2
  L1 (SIG/PWR) w0.2: U3.9 24.525,16.25 25.15,16.875 v1(25.15,16.925)
  L4 (SIG/PWR) w0.2: ALERT.1 17.75,0.875 v1(19.025,0.875) 19.025,2.675 20.6,4.25 20.6,5.094 26.325,10.819 26.325,15.75 v1(25.15,16.925)
BOOT0: BOOT0//PWR.1 R12.2 U3.31 | length 7.5
  L1 (SIG/PWR) w0.2: U3.31 24.075,10.725 24.075,10.43 24.303,10.203 24.422,10.203 24.6,10.025 R12.2 24.6,8.599 24.426,8.425 24.04,8.425 23.85,8.235 23.85,7.849 23.55,7.549 23.55,6.683 23.783,6.45 v2(24.85,6.45)
  L4 (SIG/PWR) w0.2: BOOT0//PWR.1 24.85,5.475 v2(24.85,6.45)
CAN_5V: C8.2 C29.2 C30.2 CAN_5V.1 R18.1 U2.1 U2.3 U4.13 U4.14 | length 27.1
  L1 (SIG/PWR) w0.4: R18.1 14.925,7.825 15.2,7.825 15.925,8.55 15.925,11.525 16.775,12.375 C30.2 16.8,12.4 18.5,12.4 C29.2 ; v2(16.7,12.5) 16.7,13.11 15.15,14.66 U4.13 U4.14 16.355,15.93 16.975,16.55 C8.2 18.225,16.6 18.65,17.025 U2.3 19.15,17.025 19.45,17.325 19.577,17.325 19.8,17.548 19.8,18.402 19.577,18.625 19.45,18.625 19.15,18.925 U2.1
  L4 (SIG/PWR) w0.2: CAN_5V.1 16.437,12.762 v2(16.7,12.5)
CAN_5VIN: C26.2 C27.2 C28.2 CAN_5VIN.1 J1.1 J2.1 U4.1 U4.3 U4.5 U5.8 | length 48
  L1 (SIG/PWR) w0.4: C28.2 C27.2 6.45,21.05 ; U4.5 5.85,13.39 6.5,14.04 6.5,15.28 5.85,15.93 6.5,16.58 6.5,17.82 U4.1@5.85,18.47 ; U4.1 U4.1@5.85,18.47 ; v1(5.875,25) 6.051,24.824 6.051,23.9 6.55,23.401 6.55,21.15 6.45,21.05 ; U5.8 U5.8@7.575,20.67 ; U4.1@5.85,18.47 7.475,20.095 7.475,20.57 U5.8@7.575,20.67 ; 6.45,21.05 7.195,21.05 U5.8@7.575,20.67
  L4 (SIG/PWR) w0.2: v2(5.15,15.93) 6.055,15.025 CAN_5VIN.1
  L4 (SIG/PWR) w0.4: v1(11.525,28.599) 12.801,29.875 22.15,29.875 v1(23.425,28.6)
  L4 (SIG/PWR) w0.6: v1(5.875,25) 5.875,28.887 7,30.012 10.112,30.012 v1(11.525,28.599)
CAN_GND: C21.2 C26.1 C27.1 C28.1 CAN_GND.1 J1.4 J1.5 J1.6 J2.4 J2.5 J2.6 U4.2 U4.4 U4.6 U4.7 U4.8 U5.7 | length 6.7
  L1 (SIG/PWR) w0.2: C28.1 4.025,22.85 4.025,24.85 C26.1
  L1 (SIG/PWR) w0.4: C28.1 v1(5.7,22.75) ; U4.8 v1(5.15,12.12)
  other v1: 5.15,14.66 5.15,17.2 8.05,21.94 14.5,30.5 15.25,30.5 16,30.5 16.75,30.5 14.5,31.25 15.25,31.25 16,31.25 16.75,31.25 14.5,32 15.25,32 16,32 16.75,32 14.5,32.75 15.25,32.75 16,32.75 16.75,32.75
  other v2: 31.25,26.075
CAN_H: J1.2 J2.2 K1.4 U5.6 | length 25.3
  L1 (SIG/PWR) w0.381: U5.6 8.525,23.21 9.173,23.858 9.173,24.223 9.514,24.564 9.514,25.574 9.459,25.628 9.459,26.656 9.383,26.733 9.383,27.061 v1(9.36,27.084) 9.627,27.35 9.627,27.401 10.275,28.049 J1.2
  L4 (SIG/PWR) w0.381: v1(9.36,27.084) 9.383,27.061 9.383,26.911 9.9,26.393 11.575,26.393 11.631,26.45 13.399,26.45 v1@13.513,26.565 ; v1(13.501,26.576) 13.512,26.588 13.83,26.588 15.953,28.71 18.453,28.71 19.078,29.335 21.416,29.335 22.15,28.6 v2(22.175,28.6) 22.152,28.577 22.152,28.136 21.97,27.954 21.97,27.573 23.242,26.301 23.742,26.301 24.002,26.561 24.002,26.664 v2(24.025,26.686)
CAN_L: J1.3 J2.3 K2.4 U5.5 | length 24.2
  L1 (SIG/PWR) w0.381: U5.5 8.525,24.48 8.779,24.734 8.779,26.438 v1@8.725,26.492 ; v1(8.725,26.525) 8.725,26.557 8.697,26.585 8.697,27.358 8.916,27.576 8.916,28.49 J1.3
  L4 (SIG/PWR) w0.381: v1(8.725,26.525) 8.748,26.502 8.893,26.502 9.637,25.758 11.838,25.758 11.894,25.815 13.378,25.815 13.493,25.7 v1@13.557,25.7 ; v1(13.525,25.7) v1@13.557,25.7 ; v2(24,24.825) 24,25.375 23.709,25.666 22.979,25.666 20.925,27.72 v2(20.925,28.6) 20.893,28.6 20.793,28.7 19.341,28.7 18.716,28.075 16.216,28.075 14.093,25.953 13.81,25.953 v1@13.557,25.7
CAN_RX: J8.1 U3.21 U5.3 | length 19
  L1 (SIG/PWR) w0.2: v1(13.326,23.201) 13.916,23.201 14.125,23.41 14.125,23.524 14.475,23.874 14.475,24.866 14.45,24.891 J8.1 ; v1(19.6,13.2) 19.681,13.2 19.956,12.925 20.375,12.925 U3.21
  L4 (SIG/PWR) w0.2: v1(13.326,23.201) 13.407,23.201 13.747,22.861 13.799,22.861 14.05,22.61 14.05,18.418 15.715,16.753 16.155,16.753 17.819,15.089 17.819,14.649 18.493,13.975 18.9,13.975 19.6,13.275 v1(19.6,13.2)
CAN_TERM_EN: R19.1 R20.1 U3.19 | length 13.4
  L1 (SIG/PWR) w0.2: v2(19.075,24.475) R19.1 ; v2(19.813,13.887) 20.413,13.887 U3.19
  L4 (SIG/PWR) w0.2: v2(19.075,24.475) 19.075,24.466 19.46,24.082 19.46,23.94 19.813,23.587 v2(19.813,13.887)
CAN_Termination: C21.1 R15.2 R16.1 | length 4.5
  L1 (SIG/PWR) w0.2: R15.2 27.037,24.388 27.037,26.238 R16.1 27.162,26.137 29.488,26.137 C21.1
CAN_TX: J7.1 U3.22 U5.2 | length 15.9
  L1 (SIG/PWR) w0.2: v1(13.326,21.951) 13.337,21.94 14.408,21.94 14.525,22.057 14.525,22.575 J7.1 ; v1(19.6,12.4) 19.613,12.388 20.412,12.388 U3.22
  L4 (SIG/PWR) w0.2: v1(13.326,21.951) 13.326,21.925 12.95,21.549 12.95,18.975 15.522,16.403 16.01,16.403 17.469,14.944 17.469,14.504 19.573,12.4 v1(19.6,12.4)
CELL1N: J3.7 R7.1 | length 4.4
  L1 (SIG/PWR) w0.2: R7.1@-0.45,4.6 0.4,5.45 J3.7
CELL1P: J3.6 R6.1 | length 15.6
  L1 (SIG/PWR) w0.2: J3.6 0.4,10.02 3.325,7.095 3.325,6.465 3.675,6.115 3.675,4.65 3.688,4.638 3.688,0.113 4.94,-1.14 5.14,-1.14 5.55,-1.55 5.55,-2.195 R6.1
CELL2P: J3.5 R5.1 | length 16.1
  L1 (SIG/PWR) w0.2: J3.5 2.5,11.5 2.5,8.614 3.2,7.914 3.2,7.715 3.675,7.24 3.675,6.61 4.025,6.26 4.025,4.795 4.038,4.783 4.038,1.072 4.649,0.461 4.779,0.461 5.475,-0.235 R5.1
CELL3P: J3.4 R4.1 | length 16.5
  L1 (SIG/PWR) w0.2: J3.4 2.85,13.65 2.85,8.759 3.55,8.059 3.55,7.86 4.025,7.385 4.025,6.755 4.375,6.405 4.375,4.94 4.388,4.928 4.388,3.463 5.15,2.7 5.15,2.1 R4.1
CELL4P: J3.3 R3.1 | length 17
  L1 (SIG/PWR) w0.2: J3.3 3.2,15.8 3.2,8.904 3.9,8.204 3.9,8.005 4.375,7.53 4.375,6.9 4.738,6.538 4.738,6.217 4.725,6.205 4.725,5.085 5.15,4.66 5.15,4.06 R3.1
CELL5P: J3.2 R2.1 | length 17.6
  L1 (SIG/PWR) w0.2: J3.2 3.55,17.95 3.55,9.049 4.725,7.874 4.725,7.045 5.15,6.62 5.15,6.02 R2.1
CELL6P: J3.1 R1.1 | length 18.1
  L1 (SIG/PWR) w0.2: J3.1 0.4,22.52 3.9,19.02 3.9,9.194 5.075,8.019 5.075,8.005 5.475,7.605 R1.1
GND: C1.1 C8.1 C9.1 C10.1 C11.1 C12.1 C13.1 C14.1 C15.1 C16.1 C17.1 C18.1 C19.1 C20.1 C29.1 C30.1 C31.1 GND.1 J4.2 J4.3 J4.4 J5.6 J5.7 J5.8 J6.2 J7.2 J7.3 J7.4 J8.2 J8.3 J8.4 K1.2 K2.2 R12.1 U1.10 U1.11 U1.12 U2.2 U3.16 U3.32 U3.33 U4.9 U4.10 U4.11 U4.12 U4.15 U4.16 U5.4 | length 7.4
  L1 (SIG/PWR) w0.2: v2(22.25,24.011) 22.475,24.011 22.75,24.286 22.837,24.286 23,24.449 23,25.386 22.5,25.886 K1.2 ; v1(24,12) 24,11.9 24.525,11.375 U3.32
  L1 (SIG/PWR) w0.4: v1(13.175,-0.4) U1.10@13.175,-0.375 ; C8.1 16.975,18.275 17.275,17.975 U2.2
  L4 (SIG/PWR) w0.4: J6.2 25.115,21.851 25.653,22.389 25.806,22.389 v1(25.825,22.408)
  other v1: 14.625,3.125 30.3,9.1 21.6,12 22.4,12 23.2,12 21.6,12.767 22.4,12.767 23.2,12.767 24,12.767 21.6,13.533 22.4,13.533 23.2,13.533 24,13.533 21.6,14.3 22.4,14.3 23.2,14.3 24,14.3
K1_ANODE: K1.1 R19.2 | length 1.7
  L1 (SIG/PWR) w0.2: R19.2 21.006,26.681 22.269,26.681 K1.1
K2_ANODE: K2.1 R20.2 | length 1.6
  L1 (SIG/PWR) w0.2: R20.2@20.85,24.425 20.85,24.544 21.125,24.819 K2.1@22.244,24.819
NRST: C19.2 J5.2 J6.4 U3.4 | length 34.5
  L1 (SIG/PWR) w0.2: U3.4 25.275,12.875 25.375,12.775 25.52,12.775 25.675,12.62 25.675,12.325 27.3,10.7 27.3,9.567 27.8,9.067 27.8,8.534 28.175,8.159 28.175,7.675 v1(28.55,7.3) ; v1(27.3,20.025) 27.3,18.9 28.005,18.195 28.005,18.095 28.525,17.575 J5.2
  L4 (SIG/PWR) w0.2: J6.4 24.797,22.908 26.032,22.908 26.496,22.444 26.496,21.982 26.975,21.504 26.975,21.402 27.325,21.052 27.325,20.325 ; v1(27.3,20.025) 27.325,20.05 27.325,20.325 ; v1(28.55,7.3) 27.754,8.096 27.754,17.908 27.871,18.025 29.294,18.025 29.411,18.142 29.411,20.66 29.121,20.95 27.95,20.95 27.325,20.325
PWR_3V3: BOOT0//PWR.2 C9.2 C16.2 C17.2 C18.2 C31.2 J5.1 J6.6 PWR_3V3.1 R9.2 R10.2 R11.2 U2.5 U3.1 U3.5 U3.17 U5.1 | length 83.9
  L1 (SIG/PWR) w0.2: v1(20.501,21.151) 20.501,19.674 U2.5@21.25,18.925 ; U3.1 25.275,11.375 26.5,10.15 v1(26.5,9.225)
  L1 (SIG/PWR) w0.4: v1(13.45,20.67) 13.45,19.834 13.684,19.6 14.2,19.6 14.4,19.8 15.3,19.8 C31.2 ; v1(18.7,14.475) 19,14.775 19.425,14.775 19.525,14.875 U3.17 ; v1(21.1,8.975) 21.125,8.95 21.125,7.15 v1(21.15,7.125) ; U2.5 22.9,18.925 23.15,18.675 23.15,20.55 C9.2 ; 23.238,18.587 25.088,18.587 R11.2 26.425,18.525 27.722,17.227 27.722,17.127 28.425,16.425 28.975,16.425 J5.1 ; U3.5@25.225,13.375 25.561,13.375 27.75,11.186 27.75,9.9 28.55,9.1 28.65,9.1 29.5,9.95 31.141,9.95 31.375,9.716 31.375,6.679 31.071,6.375 27.625,6.375 ; v1(26.5,9.225) 26.5,9.175 26.8,8.875 26.85,8.875 27.35,8.375 27.35,8.176 27.35,6.609 27.584,6.375 27.625,6.375 ; v2(28.075,5.425) 28.048,5.425 27.898,5.575 27.859,5.575 27.625,5.809 27.625,6.375
  L3 (SIG/GND) w0.2: v1(18.7,14.475) 18.7,14.556 18.875,14.731 18.875,16.425 v1(21.375,18.925)
  L3 (SIG/GND) w0.4: v1(13.45,20.67) 13.469,20.651 13.469,19.881 18.045,15.305 18.045,15.13 v1(18.7,14.475) 18.7,13.6 18.875,13.425 18.875,10.475 20.375,8.975 v1(21.1,8.975) ; v1(21.15,7.125) 22.15,7.125 22.2,7.175 24.45,7.175 v1(26.5,9.225)
  L4 (SIG/PWR) w0.2: PWR_3V3.1 16.181,13.894 v1(21.1,8.975) ; v1(20.501,21.151) 20.451,21.201 20.451,21.526 20.569,21.644 20.806,21.644 20.912,21.538 21.488,21.538 21.625,21.675 22.135,21.675 22.311,21.851 J6.6 ; BOOT0//PWR.2 v2(28.075,5.425)
RELAY1_RES: K1.3 R16.2 | length 2.1
  L1 (SIG/PWR) w0.2: K1.3 25.614,25.886 25.35,26.15 R16.2
RELAY2_RES: K2.3 R15.1 | length 1.4
  L1 (SIG/PWR) w0.2: K2.3 24.054,23.957 R15.1@25.425,23.957
SCL: R9.1 SCL.1 U1.19 U3.29 | length 13.5
  L1 (SIG/PWR) w0.2: U1.19 19.1,4.925 19.779,4.925 19.975,5.121 19.975,9.285 20.515,9.825 21.043,9.825 21.143,9.725 21.9,9.725 22.65,8.975 R9.1 22.725,9 22.725,10.125 22.975,10.375 22.975,10.725 U3.29
  L4 (SIG/PWR) w0.2: SCL.1 17.825,4.8 v1(18.986,4.8)
SDA: R10.1 SDA.1 U1.18 U3.30 | length 13.1
  L1 (SIG/PWR) w0.2: v1(18.975,4.15) 19.1,4.275 19.779,4.275 20.325,4.821 20.325,5.86 20.783,6.317 21.817,6.317 21.902,6.402 21.977,6.402 22.7,7.125 R10.1 ; R10.1@22.775,7.125 23.175,7.525 23.175,7.825 23.2,7.85 23.2,7.9 23.5,8.2 23.5,8.38 23.525,8.405 U3.30
  L4 (SIG/PWR) w0.2: SDA.1 16.575,1.7 18.975,4.1 v1(18.975,4.15)
SWCLK: J5.5 J6.3 U3.24 | length 18.6
  L1 (SIG/PWR) w0.2: v1(19.754,11.029) 19.811,11.086 19.986,11.086 20.225,11.325 20.375,11.325 U3.24
  L3 (SIG/GND) w0.2: v1(24.374,21.219) 24.36,21.233 24.36,21.791 24.477,21.908 25.99,21.908 25.992,21.91 26.568,21.91 26.57,21.908 28.592,21.908 v1(29.05,21.45)
  L4 (SIG/PWR) w0.2: v1(19.754,11.029) 20.663,11.938 20.663,14.239 20.513,14.389 20.513,16.738 23.74,19.965 23.74,20.583 24.374,21.217 v1(24.374,21.219)
SWDIO: J5.4 J6.5 U3.23 | length 20.9
  L1 (SIG/PWR) w0.2: v1(19.675,11.725) 19.825,11.875 U3.23 ; v1(21.775,21.075) 22.092,20.758 22.258,20.758 22.375,20.875 22.375,21.185 22.565,21.375 23.685,21.375 23.875,21.185 23.875,20.472 23.992,20.355 24.437,20.355 24.607,20.525 25.989,20.525 25.992,20.522 27.082,20.522 27.085,20.525 28.175,20.525 28.175,20.425 28.525,20.075 J5.4
  L4 (SIG/PWR) w0.2: v1(19.675,11.725) 19.682,11.725 20.313,12.356 20.313,14.094 20.163,14.244 20.163,16.883 21.875,18.595 21.875,19.986 22.41,20.521 J6.5 22.35,20.581 21.856,21.075 v1(21.775,21.075)
SWO: J5.3 J6.1 U3.26 | length 17.3
  L1 (SIG/PWR) w0.2: v1(21.525,10.225) U3.26
  L4 (SIG/PWR) w0.2: v1(21.525,10.225) 21.013,10.737 21.013,14.384 20.9,14.497 20.9,16.471 J6.1 25.933,20.581 27.163,19.351 v1(28.901,19.351)
THERMAL: C13.2 J4.1 R8.2 U3.11 | length 24.7
  L1 (SIG/PWR) w0.2: J4.1 22.754,1.731 24.273,3.25 24.45,3.25 C13.2 24.45,4.05 24.025,4.05 22.775,5.3 v1(22.725,5.3) 22.862,5.437 R8.2@22.938,5.437 ; U3.11 23.563,15.513 23.563,16.063 v1(23.6,16.1)
  L4 (SIG/PWR) w0.2: v1(22.725,5.3) 22.725,6.157 27.35,10.782 27.35,15.432 25.357,17.425 24.267,17.425 24.15,17.308 24.15,16.65 v1(23.6,16.1)
V3P3: C20.2 U1.20 | length 1.7
  L1 (SIG/PWR) w0.2: U1.20 C20.2
VC0: C1.2 C2.1 R7.2 U1.9 VC0.1 | length 30.4
  L1 (SIG/PWR) w0.2: R7.2 1.275,3.321 3.338,1.259 3.338,-2.113 4.598,-3.373 13.702,-3.373 14.925,-2.15 C2.1 14.975,-0.795 14.055,0.125 13.3,0.125 U1.9 ; C2.1@15.025,-2.15 15.975,-3.1 18.45,-3.1 18.717,-2.833 18.717,-2.233 C1.2
  L4 (SIG/PWR) w0.4: v1(1.275,4.612) 1.302,4.612 1.365,4.55 VC0.1
VC1: C2.2 C3.1 R6.2 U1.8 VC1.1 | length 13.5
  L1 (SIG/PWR) w0.2: v1(7.125,-2.195) 7.987,-2.195 8.787,-2.995 10.297,-2.995 11.047,-2.245 C3.1 11.144,-2.197 13.228,-2.197 C2.2 13.225,-2.15 12.175,-1.1 12.175,0.579 12.371,0.775 13.05,0.775 U1.8
  L4 (SIG/PWR) w0.4: v1(7.125,-2.195) 7.144,-2.214 9.366,-2.214 VC1.1@9.397,-2.245
VC2: C3.2 C4.1 R5.2 U1.7 VC2.1 | length 11
  L1 (SIG/PWR) w0.2: R5.2@7.175,-0.235 8.785,-1.845 8.997,-1.845 C3.2 9.447,-2.245 9.847,-1.845 9.847,-1.795 10.55,-1.092 10.55,-0.64 C4.1 10.975,-0.265 11.825,0.585 11.825,0.879 12.371,1.425 13.05,1.425 U1.7
  L4 (SIG/PWR) w0.4: v1(7.125,-0.235) 7.14,-0.25 9.21,-0.25 VC2.1@9.225,-0.265
VC3: C4.2 C5.1 R4.2 U1.6 VC3.1 | length 10.2
  L1 (SIG/PWR) w0.2: R4.2@7.175,1.725 8.765,0.135 8.825,0.135 C4.2 9.275,-0.265 10.475,0.935 10.475,1.315 10.875,1.715 C5.1 11.25,2.04 11.833,2.04 11.993,2.2 U1.6
  L4 (SIG/PWR) w0.4: v1(7.125,1.725) 7.13,1.72 9.27,1.72 VC3.1@9.275,1.715
VC4: C5.2 C6.1 R3.2 U1.5 VC4.1 | length 10.4
  L1 (SIG/PWR) w0.2: R3.2@7.175,3.685 8.745,2.115 8.825,2.115 C5.2 9.275,1.715 10.475,2.915 10.475,3.295 10.875,3.695 C6.1 11.775,3.695 12.048,3.422 12.048,3.298 12.371,2.975 13.05,2.975 U1.5
  L4 (SIG/PWR) w0.4: v1(7.125,3.685) 7.13,3.69 9.22,3.69 VC4.1@9.225,3.695
VC5: C6.2 C7.1 R2.2 U1.4 VC5.1 | length 11.2
  L1 (SIG/PWR) w0.2: R2.2@7.175,5.645 8.725,4.095 8.825,4.095 C6.2 9.275,3.695 10.475,4.895 10.475,5.275 10.875,5.675 C7.1 11.3,5.3 11.3,4.696 12.371,3.625 13.05,3.625 U1.4
  L4 (SIG/PWR) w0.4: v1(7.125,5.645) 7.14,5.66 9.21,5.66 VC5.1@9.225,5.675
VC6: C7.2 R1.2 U1.3 VC6.1 | length 10.8
  L1 (SIG/PWR) w0.2: v1(7.175,7.605) 8.705,6.075 8.825,6.075 C7.2 9.275,5.675 10.025,6.425 11.535,6.425 11.943,6.017 11.943,4.704 12.371,4.275 13.05,4.275 U1.3
  L4 (SIG/PWR) w0.4: v1(7.175,7.605) 7.194,7.586 9.114,7.586 VC6.1
VCOUT: C10.2 C14.2 U1.15 U3.6 | length 19.4
  L1 (SIG/PWR) w0.2: U1.15 19.1,2.325 19.779,2.325 20.191,2.737 20.337,2.737 21.025,3.425 C10.2 ; U3.6 25.15,13.85 26.032,13.85 26.057,13.875 26.062,13.875 26.813,13.125 v1(26.85,13.125) ; v1@26.831,13.106 26.907,13.03 26.907,12.718 28.6,11.025 C14.2
  L4 (SIG/PWR) w0.2: 21.05,5.049 26.85,10.849 v1(26.85,13.125) ; v1(21.075,3.7) 21.075,5.074
VREF: C11.2 C15.2 U1.17 U3.7 | length 23.3
  L1 (SIG/PWR) w0.2: v1(17.05,7.1) 17.05,4.746 18.171,3.625 18.85,3.625 U1.17 ; U3.7 25.825,14.375 27.9,14.375 28.6,13.675 C15.2
  L4 (SIG/PWR) w0.2: v1(17.05,7.1) 19.983,7.1 20.1,7.217 20.1,7.602 20.523,8.025 22.786,8.025 25.825,11.064 v1(25.825,14.35)
VTB: R8.1 U1.16 | length 3.9
  L1 (SIG/PWR) w0.2: U1.16 19.1,2.975 19.779,2.975 20.239,3.436 20.239,4.241 20.774,4.775 20.774,5.199 20.938,5.363 21.063,5.363 R8.1
pads on no net: J6.A J6.B J6.C MH1.3 MH2.2 MH3.4 MH4.1 U1.14 U2.4 U3.2 U3.3 U3.8 U3.10 U3.12 U3.13 U3.14 U3.15 U3.18 U3.20 U3.25 U3.27 U3.28
copper on no net:
  other v1: 0,-2.25 30.5,-2.25 -1.591,-1.591 1.591,-1.591 28.909,-1.591 32.091,-1.591 -2.25,0 -2.25,0 2.25,0 28.25,0 28.25,0 32.75,0 -1.591,1.591 1.591,1.591 28.909,1.591 32.091,1.591 0,2.25 30.5,2.25 0,28.25 30.5,28.25 -1.591,28.909 1.591,28.909 28.909,28.909 32.091,28.909 -2.25,30.5 -2.25,30.5 2.25,30.5 28.25,30.5 28.25,30.5 32.75,30.5 -1.591,32.091 1.591,32.091 28.909,32.091 32.091,32.091 0,32.75 30.5,32.75

## Polygon pours and split planes (outlines as drawn)
GND on L1 (SIG/PWR) "GND_L01_P007" (solid, remove dead copper, pour order 7): -3.75,8.775 11.975,8.775 11.975,29.625 17.575,29.625 17.825,29.375 17.825,26.825 27.85,26.825 28.075,26.6 28.075,25.075 34.35,25.075 35.35,24.075 35.35,-4.3 -6.8,-4.3 -7.025,-4.075 -6.375,-3.425 -6.375,8.725
CAN_GND on L1 (SIG/PWR) "CAN_GND_L01_P000" (solid, remove dead copper, pour order 0): -3.798,9.257 -3.705,9.35 11.375,9.35 11.375,30.125 11.35,30.15 18.3,30.15 18.3,27.628 28.525,27.628 28.525,25.475 34.275,25.475 34.275,39.475 33.5,40.25 33.425,40.175 -8.25,40.175 -8.25,9.9 -7.45,9.1
GND on L2 (GND) "GND_L02_P013" (solid, remove dead copper, pour order 13): -3.75,8.775 11.975,8.775 11.975,29.625 17.575,29.625 17.825,29.375 17.825,26.825 27.85,26.825 28.075,26.6 28.075,25.075 34.35,25.075 35.35,24.075 35.35,-4.3 -6.8,-4.3 -7.025,-4.075 -6.375,-3.425 -6.375,8.725
CAN_GND on L2 (GND) "CAN_GND_L02_P002" (solid, remove dead copper, pour order 2): -3.798,9.257 -3.705,9.35 11.375,9.35 11.375,30.125 11.35,30.15 18.3,30.15 18.3,27.628 28.525,27.628 28.525,25.475 34.275,25.475 34.275,39.475 33.5,40.25 33.425,40.175 -8.25,40.175 -8.25,9.9 -7.45,9.1
GND on L4 (SIG/PWR) "GND_L04_P014" (solid, remove dead copper, pour order 14): -3.75,8.775 11.975,8.775 11.975,29.625 17.575,29.625 17.825,29.375 17.825,26.825 27.85,26.825 28.075,26.6 28.075,25.075 34.35,25.075 35.35,24.075 35.35,-4.3 -6.8,-4.3 -7.025,-4.075 -6.375,-3.425 -6.375,8.725
CAN_GND on L4 (SIG/PWR) "CAN_GND_L04_P005" (solid, remove dead copper, pour order 5): -3.81,9.27 -3.717,9.362 11.362,9.362 11.362,30.138 11.338,30.163 18.287,30.163 18.287,27.64 28.513,27.64 28.513,25.488 34.262,25.488 34.262,39.488 33.487,40.263 33.412,40.187 -8.262,40.187 -8.262,9.912 -7.462,9.112
GND on L3 (SIG/GND) "GND_L03_P012" (solid, remove dead copper, pour order 12): -3.75,8.775 11.975,8.775 11.975,29.625 17.575,29.625 17.825,29.375 17.825,26.825 27.85,26.825 28.075,26.6 28.075,25.075 34.35,25.075 35.35,24.075 35.35,-4.3 -6.8,-4.3 -7.025,-4.075 -6.375,-3.425 -6.375,8.725
CAN_GND on L3 (SIG/GND) "CAN_GND_L03_P006" (solid, remove dead copper, pour order 6): -3.835,9.295 -3.742,9.387 11.338,9.387 11.338,30.163 11.313,30.187 18.263,30.187 18.263,27.665 28.488,27.665 28.488,25.512 34.238,25.512 34.238,39.512 33.463,40.287 33.387,40.212 -8.287,40.212 -8.287,9.937 -7.487,9.137

## Keep-outs
L1 (SIG/PWR):
  rectangle: 15.125,26.45 16.825,28
  rectangle: 15.575,22.2 17.275,23.75

## Silkscreen, mask and mechanical layers (free items; w line width, h text height)
Top Overlay:
  lines w0.254: -2.738,9.089 -1.738,9.089 ; -0.738,9.089 0.262,9.089 ; 1.262,9.089 2.262,9.089 ; 3.262,9.089 4.262,9.089 ; 5.262,9.089 6.262,9.089 ; 7.262,9.089 8.262,9.089 ; 9.262,9.089 10.262,9.089 ; 11.625,9.675 11.625,10.675 ; 11.625,11.675 11.625,12.675 ; 11.625,13.675 11.625,14.675 ; 11.625,15.675 11.625,16.675 ; 11.625,17.675 11.625,18.675 ; 11.625,19.675 11.625,20.675 ; 11.625,21.675 11.625,22.675 ; 11.625,23.675 11.625,24.675 ; 11.625,25.675 11.625,26.675 ; 11.625,27.675 11.625,28.675 ; 12.287,29.839 13.287,29.839 ; 14.287,29.839 15.287,29.839 ; 16.287,29.839 17.287,29.839 ; 17.925,28.029 17.925,29.029 ; 18.4,27.4 19.4,27.4 ; 20.4,27.4 21.4,27.4 ; 22.4,27.4 23.4,27.4 ; 24.4,27.4 25.4,27.4 ; 26.4,27.4 27.4,27.4 ; 28.25,25.325 29.25,25.325 ; 28.287,26.137 28.287,27.137 ; 30.25,25.325 31.25,25.325 ; 32.25,25.325 33.25,25.325
  text "RX" at 11.95,26.85 h1.52
  text "TX" at 18.787,21.789 h1.52
Bottom Overlay:
  drawing of 32 lines, arcs and shapes, not listed
  text "CAN OUT" at 24.65,31 h1.52
  text "CAN IN" at 11.75,30.6 h1.52
  text "ISO CAN_GND" at 27.55,28.225 h1.52
  text "GND" at 24.275,25.75 h1.52
  text "+" at -0.171,24.8 h1.52
  text "6S Cell Sense" at 11.022,22.275 h1.52
  text "Jackson Barber" at 11.025,20.327 h1.52
  text "W2026" at 11.022,18.375 h1.52
  text "DEBUG TC" at 27.375,17.325 h1.52
  text "DEBUG" at 31.4,17.1 h1.52 r270
  text "THERMISTOR" at 26.9,-1.975 h1.52
M1 Board Outline:
  the board outline again, w0.254